# EAGLE board motorshieldv10_jd (EAGLE 5.06)
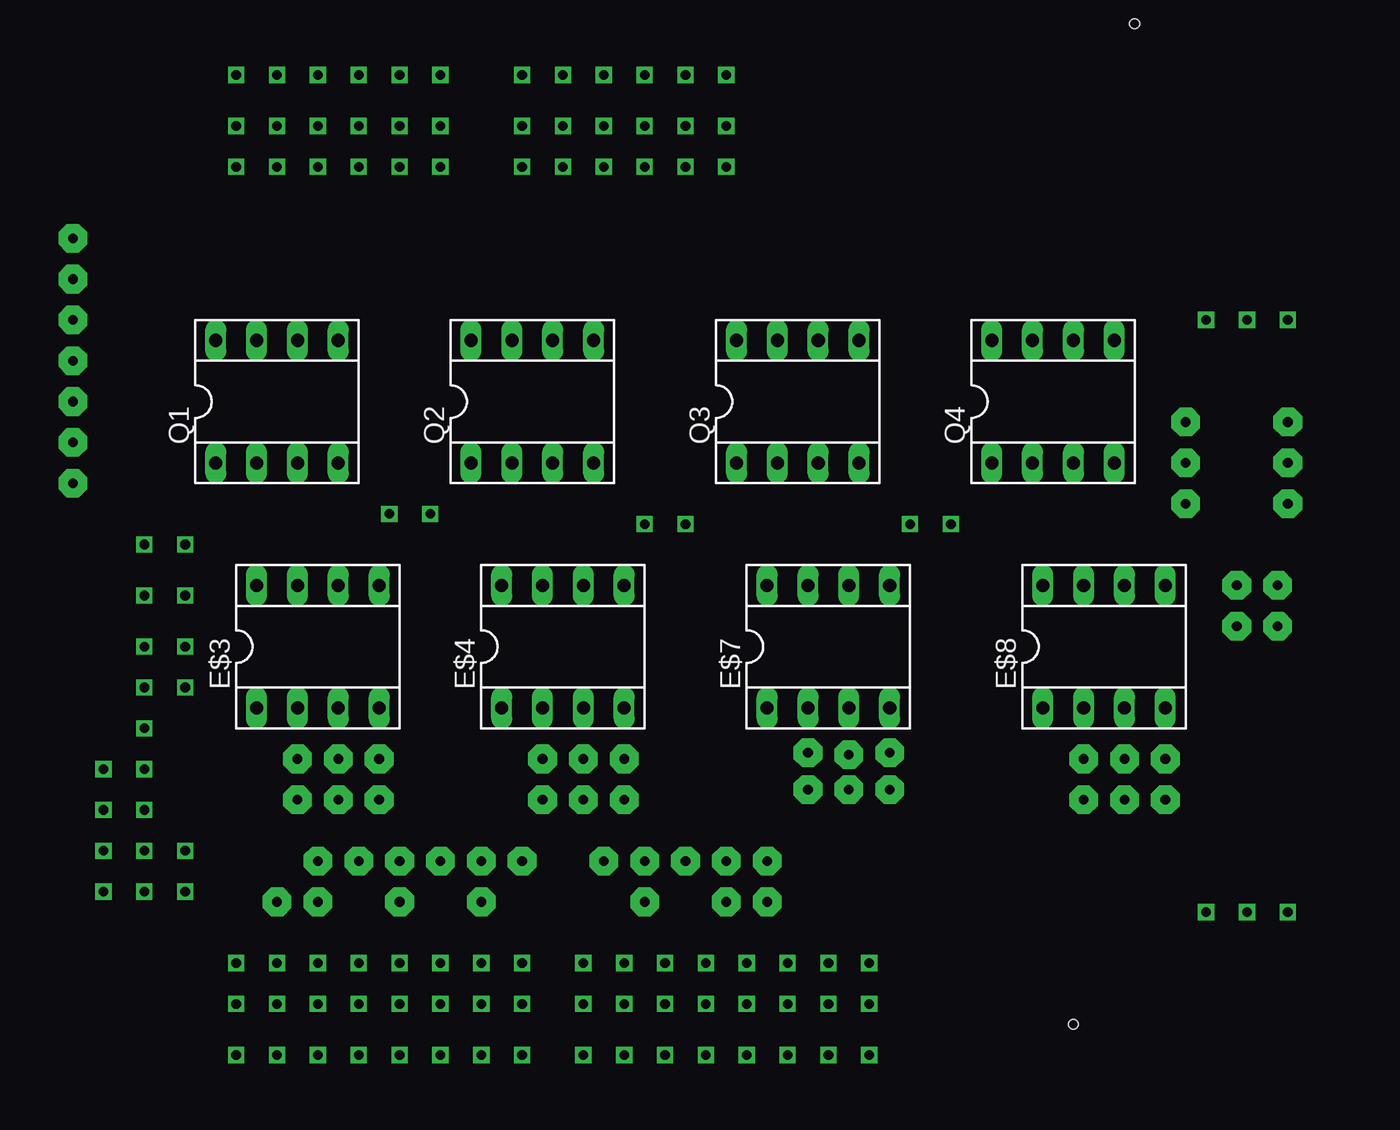
[diagram p0: board, top side]
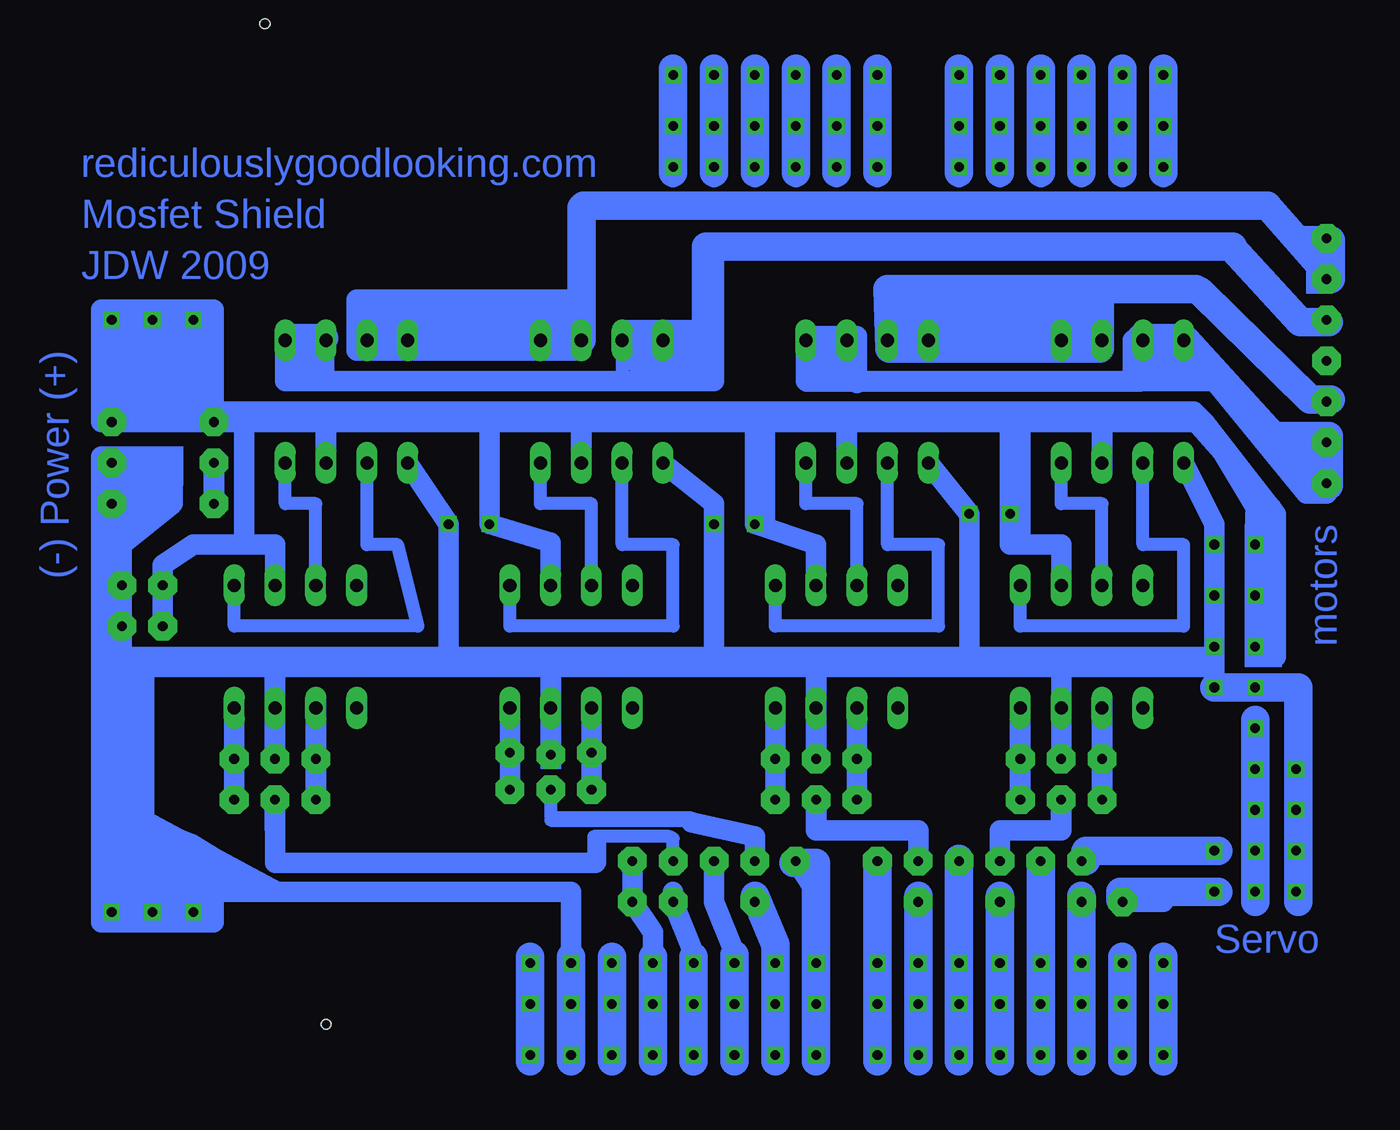
[diagram p1: board, bottom side, seen from below]

No outline drawn. Coordinates in mm, seen from the top.
Copper layers (1*16): Top 0.035mm / dielectric 1.5mm / Bottom 0.035mm
Design rules "default": minimum track width 10mil, minimum drill 24mil, track to track 8mil, track to pad 8mil, pad to pad 8mil, via to via 8mil, smd to smd 8mil, copper to edge 40mil, drill to drill 8mil, minimum pad ring 10mil, minimum via ring 8mil, stop-mask expansion 4mil, vias tented up to drill 0mil, thermal gap 10mil
Holes 0.6 mm at -1.91,59.05 5.71,-12.06 62.23,-5.08 66.04,57.15 -36.2,-14.61

## Footprints (pad centres in the part's own frame; a part is rotated, then mirrored left to right if it is on the bottom)
SOCKET-08 = drill 0.813 long: 1 -3.81,-3.81; 2 -1.27,-3.81; 3 1.27,-3.81; 4 3.81,-3.81; 5 3.81,3.81; 6 1.27,3.81; 7 -1.27,3.81; 8 -3.81,3.81

## Placement (x,y rotation side)
E$3  TC4427  [SOCKET-08]  15.24,18.41 0 top
E$4  TC4427  [SOCKET-08]  30.48,18.41 0 top
E$7  TC4427  [SOCKET-08]  46.99,18.41 0 top
E$8  TC4427  [SOCKET-08]  64.14,18.41 0 top
Q1  AOP610  [SOCKET-08]  12.7,33.66 0 top
Q2  AOP610  [SOCKET-08]  28.57,33.66 0 top
Q3  AOP610  [SOCKET-08]  45.09,33.66 0 top
Q4  AOP610  [SOCKET-08]  60.96,33.66 0 top

## Library data of the parts
E$3 E$4 E$7 E$8 Q1-Q4 = ic-package

## Nets
GND: E$3.3 E$4.3 E$7.3 E$8.3 Q1.1 Q2.1 Q3.1 Q4.1
S$1: E$3.5 Q1.2
S$3: E$3.7 Q1.4
S$6: E$4.7 Q2.4
S$7: E$4.5 Q2.2
S$15: E$3.4
S$16: Q3.6
S$18: E$7.5 Q3.2
S$19: Q1.7 Q1.8 Q2.5 Q2.6
S$22: E$7.7 Q3.4
S$23: E$8.7 Q4.4
S$28: E$8.5 Q4.2
S$29: E$4.2
S$31: E$4.4
S$32: E$7.2
S$34: E$7.4
S$35: E$8.2
S$39: Q1.6
S$41: E$8.4
S$72: E$7.6
S$203: Q3.7 Q3.8 Q4.5 Q4.6
S$206: Q1.3 Q2.3 Q3.3
VCC: Q4.3

## Tracks (layer width: path | path; a pad name or v marks a point on that pad's centre or on a via)
GND  (via drill 0.6, 0.6 pad 1.78)
  Bottom 0.406: v65.41,11.43 E$8.3 65.41,17.14 | v48.26,11.68 E$7.3 48.26,17.14 | v31.75,11.43 E$4.3 31.75,16.51 | v22.23,26.67 22.23,27.3 | v16.51,11.43 E$3.3 16.51,17.14
  Bottom 0.813: 46.99,-0.89 v46.99,-1.27 | 65.15,3.17 65.28,3.17 70.48,6.35 73.66,7.62 73.66,17.14 | 65.41,17.14 v65.41,11.43 | 65.41,17.14 54.61,17.14 48.26,17.14 v48.26,11.68 | 71.75,17.14 65.41,17.14 | 40.01,17.14 38.1,17.14 | 31.75,16.51 31.75,17.14 22.86,17.14
  Bottom 1.27: 46.99,-1.91 46.99,-0.89 46.99,3.17 65.15,3.17 | 73.53,16.51 73.53,7.62 65.28,3.17 | 71.75,29.84 71.75,27.3 74.93,24.77 v74.93,22.23 v74.93,19.68 74.93,17.78 | Q4.1 54.61,26.04 54.61,17.14 | Q3.1 38.1,27.3 38.1,17.14 | 74.93,17.78 74.93,17.14 73.66,17.14 71.75,17.14 | 31.75,16.51 v31.75,11.43 | v22.23,26.67 Q2.1 v22.23,26.67 | 71.75,17.14 48.26,17.14 40.01,17.14 22.86,17.14 | v22.23,26.67 22.23,17.14 22.86,17.14 | 16.51,17.14 22.86,17.14 | 16.51,17.14 v16.51,11.43 | Q1.1 6.99,26.04 6.99,17.78 | 16.51,17.14 6.99,17.14 v6.99,15.88 | v6.99,15.88 6.99,17.78 | v6.99,15.88 1.91,15.88 1.91,2.54 | 46.99,-7.37 46.99,-7.62 | 6.99,17.78 74.93,17.78 | 76.2,17.78 76.2,17.14 75.56,17.14 | 76.2,17.78 76.2,26.29 | 76.2,26.29 76.2,26.67 | 71.75,17.14 75.56,17.14 | 75.56,24.51 75.31,26.54 76.2,26.29 | 76.2,26.29 76.2,30.23 | 72.39,1.27 v73.03,1.91 | 71.12,3.17 v70.48,1.91 | 75.56,1.27 72.39,1.27 | v75.56,1.91 76.2,1.91 76.2,4.45 | 76.2,17.78 76.2,4.45 | 75.56,17.14 76.2,17.78 | 75.56,17.14 75.56,3.17 | 75.56,3.17 v75.56,1.91 | v75.56,1.91 75.56,1.27 | 75.56,1.27 74.93,16.51 74.3,16.51 74.3,3.17 | 74.3,3.17 74.3,1.91 | 73.03,3.17 74.3,3.17 | 71.75,3.17 71.75,2.54 73.66,1.91 71.75,1.91 71.75,3.17 | 75.56,3.17 73.03,3.17 | 71.75,3.17 71.12,3.17 | 73.03,3.17 71.75,3.17 | 71.12,3.17 71.12,5.71 73.66,5.71 73.66,6.99 72.39,6.35 71.75,3.81 73.03,3.81 73.03,5.08 72.39,4.45 71.75,3.17 | 71.75,3.17 69.85,3.17 | 69.22,3.17 65.41,3.17 | 69.22,3.17 69.85,3.17 | 69.85,3.17 70.48,5.08 | 70.48,5.08 69.22,4.45 | 69.22,4.45 67.94,3.81 69.22,3.81 69.22,4.45 | 69.22,4.45 67.31,3.81 71.75,4.45 71.75,6.35 70.48,5.08 | 72.39,1.27 v70.48,1.91 | v70.48,1.91 70.48,2.54
  Bottom 1.27: 69.22,1.27 v70.48,1.91 | 69.22,1.91 69.22,2.54 | 76.2,4.45 76.2,1.27 69.22,1.27 | 69.22,1.91 69.22,1.27 | 69.22,1.91 69.22,3.17 | v75.56,1.91 69.22,1.91
  Bottom 1.778: 46.99,-0.89 46.99,-7.37 | v6.99,15.88 1.78,15.88 1.78,2.54
S$1
  Bottom 0.813: E$3.5 19.05,19.68 8.89,19.68 8.89,24.77 11.43,24.77 Q1.2
S$2  (via drill 0.6, 0.6 pad 1.78)
  Bottom 0.406: 31.75,-0.64 v31.75,-1.27 | 31.75,3.17 33.02,4.45 v33.02,5.08
  Bottom 1.27: 31.75,-0.64 31.75,3.17 v33.02,5.08 | 31.75,-0.64 31.75,-1.91 | 31.75,-7.62 31.75,-7.37 31.75,-0.64
  Bottom 1.778: 31.75,-7.37 31.75,4.95 33.15,4.95
S$3
  Bottom 0.813: E$3.7 13.97,27.3 16.51,27.3 Q1.4
S$4  (via drill 0.6, 0.6 pad 1.78)
  Bottom 0.406: 34.29,-0.64 v34.29,-1.27
  Bottom 1.27: 34.29,-0.64 34.29,-0.13 34.29,0 v35.56,2.54 35.56,2.92 35.56,3.17 | 34.29,-0.64 34.29,-1.91 | 34.29,-7.62 34.29,-7.37 34.29,-0.64
  Bottom 1.778: 34.29,-7.37 34.29,-0.13 35.56,2.92
S$5  (via drill 0.6, 0.6 pad 1.78)
  Bottom 0.406: 36.83,-0.76 v36.83,-1.27 | 36.83,-0.64 36.83,0 38.1,2.54
  Bottom 1.27: 36.83,-1.91 36.83,-0.76 36.83,-0.64 38.1,2.54 v38.1,5.08 | 36.83,-7.37 36.83,-7.62
  Bottom 1.778: 36.83,-7.37 36.83,-0.76
S$6
  Bottom 0.813: Q2.4 32.38,27.3 29.21,27.3 E$4.7
S$7
  Bottom 0.813: E$4.5 34.29,19.68 24.13,19.68 24.13,24.77 27.3,24.77 Q2.2
S$8  (via drill 0.6, 0.6 pad 1.78)
  Bottom 0.406: v40.64,2.54 39.37,0 39.37,-0.64
  Bottom 1.27: 39.37,-1.91 v39.37,-1.27 39.37,-0.89 39.37,-0.64 v40.64,2.54 40.64,3.17 | 39.37,-7.37 39.37,-7.62
  Bottom 1.778: 39.37,-7.37 39.37,-0.89
S$9  (via drill 0.6, 0.6 pad 1.78)
  Bottom 0.406: 41.91,-0.89 v41.91,-1.27 | 41.91,0.64 41.91,1.27 v43.18,2.54
  Bottom 1.27: 41.91,-0.64 41.91,-0.89 41.91,0.64 v43.18,2.54 v43.18,5.08 | 41.91,-7.37 41.91,-6.35
  Bottom 1.778: 41.91,-7.37 41.91,-0.89
S$10  (via drill 0.6)
  other vias: 44.45,-1.27
S$11  (via drill 0.6)
  other vias: 73.03,38.73
S$12
  Bottom 0.813: 48.26,7.62 39.5,7.62
S$13  (via drill 0.6 pad 1.78)
  other vias: 13.97,8.89
S$14  (via drill 0.6 pad 1.78)
  Bottom 1.27: v16.51,8.89 16.51,6.99 20.32,6.99 v20.32,5.08
S$15  (via drill 0.6 pad 1.78)
  Bottom 0.406: v19.05,8.89 v19.05,11.43 E$3.4
  Bottom 1.27: v19.05,8.89 v19.05,11.43 19.05,15.24
S$16
  Bottom 0.406: 46.35,38.73 46.35,38.1
  Bottom 0.813: 46.35,38.1 Q3.6
  Bottom 1.27: 46.35,38.73 60.33,38.73 60.33,38.1 | 60.33,38.1 60.33,36.83 46.35,36.83 46.35,40.01 60.33,40.01 60.33,38.1
  Bottom 1.778: 59.82,37.47 Q3.6 46.35,38.73 46.35,40.01 46.35,45.72
S$17  (via drill 0.6)
  Bottom 0.406: v4.45,18.41 v4.45,21.59
  Bottom 0.813: v4.45,18.41 v4.45,21.59
S$18
  Bottom 0.813: E$7.5 50.8,19.68 40.64,19.68 40.64,24.77 43.81,24.77 Q3.2
S$19
  Bottom 0.406: Q2.5 32.13,37.47 Q2.6 | Q1.8 Q1.7
  Bottom 0.813: 0.25,30.86 0.51,28.83 0.51,28.96 8.89,37.72 11.56,37.72 11.56,37.59 11.56,34.67 32.38,34.67 32.38,34.92 | 29.59,37.59 32.38,37.59 Q2.5 | Q1.8 Q1.7
  Bottom 1.27: 29.21,34.8 29.21,37.72 32.38,37.72 32.38,34.92 | 32.38,34.92 32.38,35.56 | 29.21,34.92 32.38,34.92 | 27.56,34.92 29.21,34.92 | 8.89,34.92 27.56,34.92 | 8.89,34.92 8.89,36.83 10.79,36.83 10.79,35.56 10.16,35.56 10.16,36.2 | Q1.7 12.06,37.47 12.06,35.56 11.43,35.56 | 29.21,34.92 29.21,37.47 Q2.5 32.38,35.56 | 32.38,35.56 30.48,35.56 30.48,36.2 31.75,36.2 | 8.89,34.92 6.99,34.92 1.27,27.94 0,27.94 | 27.56,34.92 32.38,34.92
  Bottom 1.778: 32.13,37.47 29.72,37.47 | 11.56,37.59 9.02,37.59 Q1.8 8.76,37.47 0.89,28.83
S$20  (via drill 0.6, 0.6 pad 1.78)
  Bottom 1.27: v6.99,5.71 14.99,5.71 15.24,5.71 v15.24,5.08
  Bottom 1.778: 6.73,5.71 14.99,5.71 14.99,5.08
S$21  (via drill 0.6 pad 1.78)
  other vias: 0,36.2
S$22
  Bottom 0.406: Q3.4 48.9,27.94
  Bottom 0.813: E$7.7 45.72,27.3 48.9,27.3 Q3.4
S$23
  Bottom 0.406: Q4.4 64.77,27.94
  Bottom 0.813: E$8.7 62.87,27.3 64.77,27.3 Q4.4
S$24  (via drill 0.6 pad 1.78)
  Bottom 0.813: 1.27,33.66 v0,33.66
S$25  (via drill 0.6)
  other vias: 4.45,8.26
S$26  (via drill 0.6)
  Bottom 1.27: v40.64,48.26 40.64,48.9
S$27  (via drill 0.6)
  Bottom 1.27: v35.56,48.26 35.56,48.9
S$28
  Bottom 0.813: E$8.5 67.94,19.68 56.52,19.68 57.78,24.77 59.69,24.77 Q4.2
S$29  (via drill 0.6 pad 1.78)
  Bottom 0.406: v29.21,8.89 v29.21,11.43 E$4.2
  Bottom 1.27: v29.21,8.89 v29.21,11.43 29.21,15.24
S$30  (via drill 0.6 pad 1.78)
  Bottom 1.27: v25.4,5.08 25.4,6.99 31.75,6.99 v31.75,8.89
S$31  (via drill 0.6 pad 1.78)
  Bottom 0.406: v34.29,8.89 v34.29,11.43 E$4.4
  Bottom 1.27: v34.29,8.89 v34.29,11.43 34.29,15.24
S$32  (via drill 0.6 pad 1.78)
  Bottom 0.406: v45.72,9.53 v45.72,11.81
  Bottom 0.813: v45.72,11.81 E$7.2
  Bottom 1.27: v45.72,9.53 v45.72,11.81 45.72,15.24
S$33  (via drill 0.6 pad 1.78)
  Bottom 0.61: v48.26,9.53 48.26,9.14 48.26,8 48.13,7.75
  Bottom 0.813: 48.26,9.14 48.26,7.87 | 39.5,7.75 48.13,7.75
S$34  (via drill 0.6 pad 1.78)
  Bottom 0.406: v50.8,9.53 v50.8,11.81
  Bottom 0.813: v50.8,9.53 v50.8,11.81 E$7.4
  Bottom 1.27: v50.8,9.53 v50.8,11.81 50.8,15.24
S$35  (via drill 0.6 pad 1.78)
  Bottom 0.813: v62.87,8.89 v62.87,11.43 E$8.2
S$36  (via drill 0.6 pad 1.78)
  Bottom 0.61: v40.64,5.08 40.64,5.21 | 40.64,6.48 45.59,6.6 45.59,4.83 45.21,4.95 45.47,4.95
  Bottom 0.813: 45.21,4.95 45.21,6.48 45.59,6.6 | 40.89,6.6 40.77,6.48 | 45.34,6.48 45.34,5.71 45.59,4.95 45.59,6.48 45.34,6.48 | 40.89,6.6 45.59,6.6 | 45.59,6.6 45.34,6.48 | 40.89,6.6 40.64,6.48 40.64,5.21
  Bottom 1.27: v65.41,8.89 65.41,4.95 45.59,4.95 45.47,4.95
S$37  (via drill 0.6 pad 1.78)
  Bottom 0.813: v69.22,27.3 v69.22,29.84
S$38  (via drill 0.6)
  Bottom 1.27: v30.48,48.26 30.48,48.9
S$39
  Bottom 0.813: 13.97,40.01 Q1.6 13.97,40.89
S$40
  Bottom 1.778: -0.25,41.27 -0.25,43.69
S$41  (via drill 0.6 pad 1.78)
  Bottom 0.813: v67.94,8.89 v67.94,11.43 E$8.4
S$42  (via drill 0.6)
  other vias: 38.1,26.04
S$43
  Bottom 0.813: 1.27,33.78 8.76,41.02 27.3,41.02 27.3,37.34 13.97,37.34 13.97,37.47
S$44  (via drill 0.6)
  Bottom 1.27: 19.68,31.75 v19.68,26.67 19.68,24.77 19.05,24.77 | 19.05,24.77 16.51,24.77 16.51,21.59 | 19.05,24.77 19.05,31.75
S$45  (via drill 0.6)
  other vias: 54.61,26.04
S$46  (via drill 0.6)
  other vias: 4.45,24.77
S$47  (via drill 0.6)
  Bottom 1.27: v38.1,48.26 38.1,48.9
S$48  (via drill 0.6)
  other vias: 4.45,13.34
S$49  (via drill 0.6)
  Bottom 1.27: v33.02,48.26 33.02,48.9
S$51  (via drill 0.6)
  Bottom 1.27: v27.94,48.26 27.94,48.9
S$52  (via drill 0.6)
  Bottom 1.27: v22.86,48.26 22.86,48.9
S$53  (via drill 0.6)
  Bottom 1.27: v20.32,48.26 20.32,48.9
S$58  (via drill 0.6 pad 1.78)
  Bottom 1.27: 27.94,-0.64 27.94,-1.91 | 27.94,-0.64 v27.94,5.08 | 27.94,-7.62 27.94,-7.37 27.94,-0.64
  Bottom 1.778: 27.94,-7.37 v27.94,5.08
S$59  (via drill 0.6 pad 1.78)
  Bottom 1.27: 22.86,-0.64 22.86,-1.91 | 22.86,-0.64 22.86,2.54 | 22.86,-7.62 22.86,-7.37 22.86,-0.64
  Bottom 1.778: 22.86,-7.37 22.86,2.54 v22.86,5.08 22.86,5.21
S$60  (via drill 0.6, 0.6 pad 1.78)
  Bottom 0.406: 25.4,-0.64 v25.4,-1.27
  Bottom 1.27: 25.4,2.92 25.4,3.17 | 25.4,-0.64 25.4,-1.91 | 25.4,-0.64 v25.4,2.54 | 25.4,-0.64 25.4,-7.37 25.4,-7.62
  Bottom 1.778: 25.4,2.92 v25.4,2.54 25.4,-7.37
S$61  (via drill 0.6, 0.6 pad 1.78)
  Bottom 0.406: 20.32,-0.64 v20.32,-1.27
  Bottom 1.27: 20.32,-0.64 v20.32,2.54 | 20.32,-0.64 20.32,-1.91 | 20.32,2.92 20.32,3.17 | 20.32,-7.62 20.32,-7.37 20.32,-0.64
  Bottom 1.778: 20.32,-7.37 v20.32,2.54 20.32,2.92
S$62  (via drill 0.6 pad 1.78)
  Bottom 1.27: 17.78,-0.64 17.78,-1.91 | 17.78,-0.64 17.78,2.54 | 17.78,-0.64 17.78,-7.37 17.78,-7.62
  Bottom 1.778: 17.78,-7.37 17.78,2.54 v17.78,5.08
S$63  (via drill 0.6, 0.6 pad 1.78)
  Bottom 1.27: 15.24,-0.89 v15.24,-1.27 | 15.24,-0.89 15.24,-1.91 | 15.24,2.92 15.24,3.17 | 15.24,-0.89 15.24,-7.37 15.24,-7.62
  Bottom 1.778: 15.24,-0.89 v15.24,2.54 | 15.24,-7.37 v15.24,2.54 | v15.24,2.54 15.24,2.92
S$64  (via drill 0.6)
  other vias: 12.7,-1.27
S$65  (via drill 0.6)
  other vias: 10.16,-1.27
S$66  (via drill 0.6 pad 1.78)
  Bottom 0.406: v0,28.57 v0,31.11
S$67
  Bottom 1.778: -0.13,31.5 -0.13,28.45
S$68
  Bottom 0.254: 0.89,31.37 0.89,31.62 1.02,30.99
S$69  (via drill 0.6)
  other vias: 4.45,10.79
S$71  (via drill 0.6 pad 1.78)
  Bottom 0.813: 0,41.4 v0,41.27 | 0,41.4 v0,43.81 | 0,41.4 4.57,46.1 46.1,45.97
S$72
  Bottom 0.813: E$7.6 48.26,24.77
S$73
  Bottom 0.406: 41.78,37.08 41.66,37.08
S$74  (via drill 0.6)
  other vias: 49.53,-1.27
S$75
  Bottom 1.778: 46.23,45.85 3.94,45.85
S$76
  Bottom 1.778: 43.56,37.85 38.61,37.85 38.61,43.31 5.84,43.31
S$77  (via drill 0.6)
  other vias: 1.91,8.26
S$78  (via drill 0.6)
  other vias: 4.45,5.71
S$79
  Bottom 1.778: 3.68,45.85 0.13,41.78
S$80  (via drill 0.6)
  other vias: 1.91,5.71
S$81
  Bottom 1.778: -0.13,38.61 1.65,38.61 5.84,43.18
S$82
  Bottom 1.778: -0.25,33.78 1.02,33.78 7.87,40.51
S$83  (via drill 0.6, 0.6 pad 1.78)
  Bottom 1.27: v12.7,2.54 10.16,2.54 10.16,3.17 v6.99,3.17
S$84
  Bottom 1.778: 8.13,40.64 27.3,40.64 27.18,36.96 14.1,36.96 14.1,39.88
S$87  (via drill 0.6)
  Bottom 1.27: 48.26,21.59 48.26,24.89 v52.07,26.04 52.07,32.26
S$89  (via drill 0.6)
  other vias: 4.45,3.17
S$90  (via drill 0.6)
  other vias: 6.99,24.77
S$92  (via drill 0.6)
  other vias: 6.99,21.59
S$94
  Bottom 1.27: 4.45,13.84 4.45,13.97
  Bottom 1.778: 4.45,2.54 4.45,13.84
S$96  (via drill 0.6)
  other vias: 6.99,18.41
S$98  (via drill 0.6)
  other vias: 1.91,10.79
S$99
  Bottom 1.27: 10.16,-0.64 10.16,-0.89 | 10.16,-7.37 10.16,-7.62
  Bottom 1.778: 10.16,-0.89 10.16,-7.37
S$100
  Bottom 1.27: 12.7,-0.64 12.7,-0.89 | 12.7,-7.62 12.7,-7.37
  Bottom 1.778: 12.7,-0.89 12.7,-7.37
S$101  (via drill 0.6)
  other vias: 22.86,-1.27
S$102
  Bottom 1.27: 44.45,-0.89 44.45,-0.64 | 44.45,-7.62 44.45,-7.37
  Bottom 1.778: 44.45,-7.37 44.45,-0.89
S$103
  Bottom 1.27: 49.53,-0.89 49.53,-0.64 | 49.53,-7.62 49.53,-7.37
  Bottom 1.778: 49.53,-7.37 49.53,-0.89
S$104  (via drill 0.6)
  other vias: 4.45,15.88
S$105  (via drill 0.6)
  other vias: 1.91,3.17
S$106
  Bottom 1.27: 8,32.38 8.13,32.38 3.43,27.05
S$107  (via drill 0.6)
  Bottom 1.27: v17.78,48.26 17.78,48.9
S$108  (via drill 0.6)
  Bottom 1.27: v15.24,48.26 15.24,48.9
S$109  (via drill 0.6)
  other vias: 17.78,-1.27
S$110  (via drill 0.6)
  other vias: 27.94,-1.27
S$112  (via drill 0.6)
  Bottom 1.27: v12.7,48.26 12.7,48.9
S$113  (via drill 0.6 pad 1.78)
  Bottom 0.813: v75.56,27.3 v75.56,29.84
  Bottom 1.27: 73.66,27.94 74.3,26.67 74.3,25.4 72.39,27.94 73.66,28.57 v75.56,27.3 | 74.3,27.3 v75.56,27.3 | v75.56,27.3 76.2,27.3 | 74.3,29.84 v75.56,29.84 76.2,29.84 76.2,27.3 | 74.93,25.4 76.2,27.3
S$125
  Bottom 1.778: 6.73,3.17 12.7,3.17
S$135  (via drill 0.6)
  other vias: 10.16,50.8
S$136  (via drill 0.6)
  other vias: 10.16,53.98
S$137  (via drill 0.6)
  other vias: 12.7,50.8
S$138  (via drill 0.6)
  other vias: 15.24,50.8
S$139  (via drill 0.6)
  other vias: 17.78,50.8
S$140  (via drill 0.6)
  other vias: 20.32,50.8
S$141  (via drill 0.6)
  other vias: 22.86,50.8
S$142  (via drill 0.6)
  other vias: 27.94,50.8
S$143  (via drill 0.6)
  other vias: 30.48,50.8
S$144  (via drill 0.6)
  other vias: 33.02,50.8
S$145  (via drill 0.6)
  other vias: 35.56,50.8
S$146  (via drill 0.6)
  other vias: 38.1,50.8
S$147  (via drill 0.6)
  other vias: 40.64,50.8
S$148  (via drill 0.6)
  other vias: 12.7,53.98
S$149  (via drill 0.6)
  other vias: 15.24,53.98
S$150  (via drill 0.6)
  other vias: 17.78,53.98
S$151  (via drill 0.6)
  other vias: 20.32,53.98
S$152  (via drill 0.6)
  other vias: 22.86,53.98
S$153  (via drill 0.6)
  other vias: 27.94,53.98
S$154  (via drill 0.6)
  other vias: 30.48,53.98
S$155  (via drill 0.6)
  other vias: 33.02,53.98
S$156  (via drill 0.6)
  other vias: 35.56,53.98
S$157  (via drill 0.6)
  other vias: 38.1,53.98
S$158  (via drill 0.6)
  other vias: 40.64,53.98
S$159  (via drill 0.6)
  other vias: 10.16,-3.81
S$160  (via drill 0.6)
  other vias: 10.16,-6.99
S$161  (via drill 0.6)
  other vias: 12.7,-6.99
S$162  (via drill 0.6)
  other vias: 12.7,-3.81
S$163  (via drill 0.6)
  other vias: 15.24,-3.81
S$164  (via drill 0.6)
  other vias: 15.24,-6.99
S$165  (via drill 0.6)
  other vias: 17.78,-6.99
S$166  (via drill 0.6)
  other vias: 17.78,-3.81
S$167  (via drill 0.6)
  other vias: 20.32,-3.81
S$168  (via drill 0.6)
  other vias: 20.32,-6.99
S$169  (via drill 0.6)
  other vias: 22.86,-3.81
S$170  (via drill 0.6)
  other vias: 22.86,-6.99
S$171  (via drill 0.6)
  other vias: 25.4,-3.81
S$172  (via drill 0.6)
  other vias: 25.4,-6.99
S$173  (via drill 0.6)
  other vias: 27.94,-3.81
S$174  (via drill 0.6)
  other vias: 27.94,-6.99
S$175  (via drill 0.6)
  other vias: 31.75,-3.81
S$176  (via drill 0.6)
  other vias: 31.75,-6.99
S$177  (via drill 0.6)
  other vias: 34.29,-3.81
S$178  (via drill 0.6)
  other vias: 34.29,-6.99
S$179  (via drill 0.6)
  other vias: 36.83,-3.81
S$180  (via drill 0.6)
  other vias: 36.83,-6.99
S$181  (via drill 0.6)
  other vias: 39.37,-3.81
S$182  (via drill 0.6)
  other vias: 39.37,-6.99
S$183  (via drill 0.6)
  other vias: 41.91,-3.81
S$184  (via drill 0.6)
  other vias: 41.91,-6.99
S$185  (via drill 0.6)
  other vias: 44.45,-3.81
S$186  (via drill 0.6)
  other vias: 44.45,-6.99
S$187  (via drill 0.6)
  other vias: 46.99,-3.81
S$188  (via drill 0.6)
  other vias: 46.99,-6.99
S$189  (via drill 0.6)
  other vias: 49.53,-3.81
S$190  (via drill 0.6)
  other vias: 49.53,-6.99
S$191
  Bottom 1.27: 10.16,47.88 10.16,47.62
  Bottom 1.778: 10.16,47.88 10.16,54.36
S$192
  Bottom 1.27: 12.7,47.62 12.7,47.88 | 12.7,54.36 12.7,54.61
  Bottom 1.778: 12.7,47.88 12.7,54.36
S$193
  Bottom 1.27: 15.24,47.62 15.24,47.88 | 15.24,54.36 15.24,54.61
  Bottom 1.778: 15.24,47.88 15.24,54.36
S$194
  Bottom 1.27: 17.78,47.62 17.78,47.88 | 17.78,54.36 17.78,54.61
  Bottom 1.778: 17.78,47.88 17.78,54.36
S$195
  Bottom 1.27: 20.32,54.36 20.32,54.61 | 20.32,47.62 20.32,47.88
  Bottom 1.778: 20.32,47.88 20.32,54.36
S$196
  Bottom 1.27: 22.86,47.62 22.86,47.88 | 22.86,54.36 22.86,54.61
  Bottom 1.778: 22.86,47.88 22.86,54.36
S$197
  Bottom 1.27: 27.94,47.62 27.94,47.88 | 27.94,54.36 27.94,54.61
  Bottom 1.778: 27.94,47.88 27.94,54.36
S$198
  Bottom 1.27: 30.48,47.62 30.48,47.88 | 30.48,54.36 30.48,54.61
  Bottom 1.778: 30.48,47.88 30.48,54.36
S$199
  Bottom 1.27: 33.02,47.62 33.02,47.88 | 33.02,54.36 33.02,54.61
  Bottom 1.778: 33.02,47.88 33.02,54.36
S$200
  Bottom 1.27: 35.56,47.62 35.56,47.88 | 35.56,54.36 35.56,54.61
  Bottom 1.778: 35.56,47.88 35.56,54.36
S$201
  Bottom 1.27: 38.1,47.62 38.1,47.88 | 38.1,54.36 38.1,54.61
  Bottom 1.778: 38.1,47.88 38.1,54.36
S$202
  Bottom 1.27: 40.64,47.62 40.64,47.88 | 40.64,54.36 40.64,54.61
  Bottom 1.778: 40.64,47.88 40.64,54.36
S$203  (via drill 0.6 pad 1.78)
  Bottom 0.406: Q4.5 Q4.6 | 38.1,37.47 Q3.8
  Bottom 0.813: 62.1,37.47 Q4.5 Q4.6 | 43.81,34.92 Q3.7 38.1,37.47 38.1,38.1 38.1,42.55 38.1,43.69 6.86,43.69 1.91,38.73 v0,38.73
  Bottom 1.27: Q4.5 64.77,34.92 38.1,34.92 | 38.1,34.92 38.1,38.1 38.73,35.56 38.73,36.2 43.18,36.2 43.18,36.83 39.37,36.83 | 38.1,42.55 38.1,34.92
S$204
  Bottom 1.27: 34.92,26.04 34.92,31.75
S$205
  Bottom 1.778: 62.36,37.59 64.39,37.59
S$206  (via drill 0.6, 0.6 pad 1.78)
  Bottom 0.813: 46.35,32.38 52.07,32.38 | 46.35,32.38 Q3.3 | Q2.3 29.84,32.38 35.56,32.38 46.35,32.38 | 13.97,32.38 Q1.3 | 19.68,32.38 19.05,32.38 15.24,32.38
  Bottom 1.27: v72.39,19.68 v72.39,22.23 72.39,23.5 70.48,24.77 67.31,24.77 | 65.41,21.59 65.41,24.77 67.31,24.77 | 31.75,21.59 31.75,24.77 v35.56,26.04 35.56,32.38 | 67.31,32.38 67.31,24.77 | 67.31,32.38 v69.22,32.38 v75.56,32.38 76.2,32.38 76.2,33.02 | 13.97,29.21 13.97,32.38 15.24,32.38 | 35.56,32.38 67.31,32.38 | 19.05,32.38 35.56,32.38 | 76.2,33.02 76.2,39.37 69.22,39.37 | 76.2,33.02 8.26,33.02 7.62,32.38 | 15.24,32.38 35.56,32.38 | 7.62,32.38 15.24,32.38 | 7.62,32.38 3.81,26.04 | 7.62,32.38 3.17,26.67 3.17,17.78 4.45,17.78 4.45,26.67 | 69.22,39.37 v70.48,38.73 | 69.22,39.37 69.22,33.66
S$207
  Bottom 1.778: 12.83,3.17 12.83,2.67
S$208  (via drill 0.6)
  other vias: 75.56,38.73
S$209  (via drill 0.6 pad 1.78)
  Bottom 1.27: v35.56,5.08 35.56,6.6 39.5,7.49
S$211  (via drill 0.6 pad 1.78)
  other vias: 13.97,11.43
S$212  (via drill 0.6)
  Bottom 1.27: v10.16,48.26 10.16,48.9
VCC
  Bottom 0.813: Q4.3 62.23,32.38
(copper drawn outside any net)
  shapes: Bottom area x82

## Text on the board
Bottom: rediculouslygoodlooking.com | Mosfet Shield | JDW 2009 | (-) Power (+) | motors | Servo